# Altium PCB C.PcbDoc
Units mm, origin at the board's own origin, x right, y up, seen from the top; angles counter-clockwise.
Board outline 22 x 42 mm, 2 copper layers (Top Layer, Bottom Layer); 2 components, 6 nets, 34 pads, 0 vias.
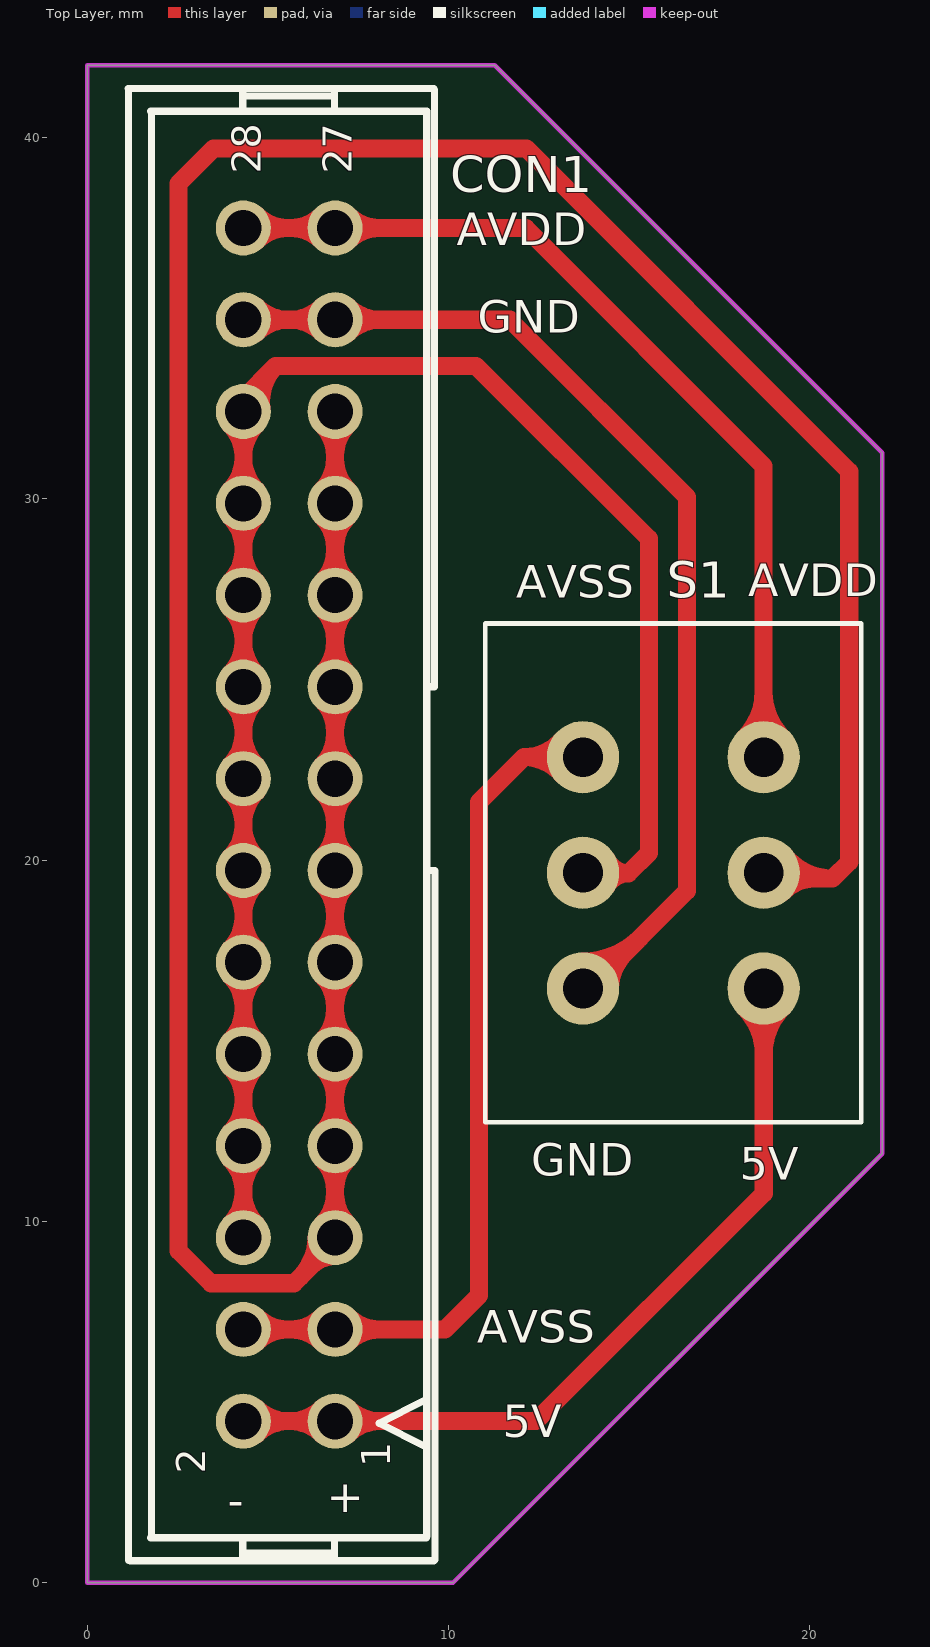
[diagram p0: Top Layer view]
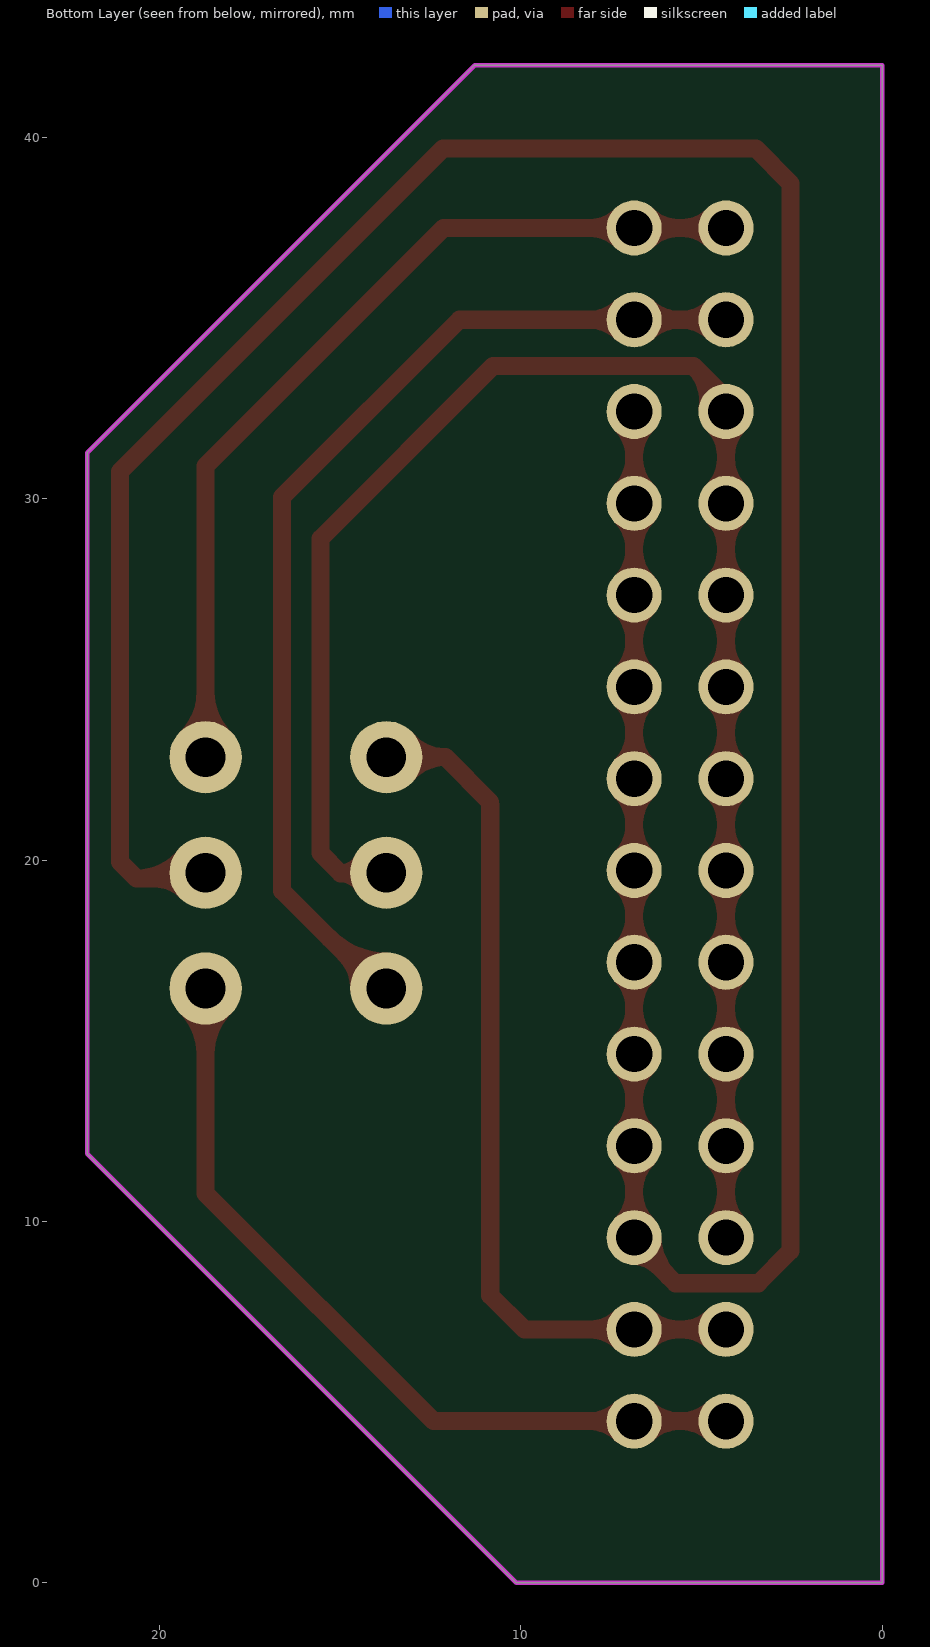
[diagram p1: Bottom Layer view, seen from below]

## Layer stack, top to bottom
Top Layer: signal copper 0.0356
Dielectric: dielectric 0.32, FR-4, Dk 4.8
Bottom Layer: signal copper 0.0356

## Board outline
0,0 0,42 11.278,42 22,31.278 22,11.875 10.125,0

## Design rules (kind name [scope] priority, off if disabled: settings)
Clearance Clearance_1 [inpolygon] p1: gap=0.5
Clearance [All] p2: gap=0.15
MinimumSolderMaskSliver [All] p1: minsoldermaskwidth=0.01
PolygonConnect PolygonConnect_1 [isvia] p1: connectstyle=Direct reliefconductorwidth=0.254 reliefentries=4 polygonreliefangle="90 Angle"
PolygonConnect [All] p2: connectstyle=Relief reliefconductorwidth=0.254 reliefentries=4 polygonreliefangle="90 Angle"
RoutingVias [All] p1: holewidth=0.3 width=0.66 viastyle="Through Hole" minholewidth=0.3 minwidth=0.66 maxholewidth=0.3 maxwidth=0.66
SilkToSilkClearance [All] p1: silktosilkclearance=0.01
SilkscreenOverComponentPads [All] p1: minsilkscreentomaskgap=0.01
SolderMaskExpansion [All] p1: expansion=0.102
Width [All] p1: maxlimit=1 minlimit=0.15 preferedwidth=0.254 minimp=50.000000 maximp=50.000000 favimp=50.000000
25 further rules are at their usual default settings.

## Components (designator, comment, footprint, x,y, rotation, side; value= is the part's Value field where it differs from the comment)
CON1 "SV1" 26 5.591,22.254 r0 top locked
S1 "switch" switch1 16.221,19.65 r270 top locked

## Footprints (in the part's own frame and the unit in brackets; to place one, negate y for a bottom-side part, rotate by r counter-clockwise, add the part's x,y. Pads: shape width x height; smd on the part's side, far side on the other; paste and mask are expansions set on the pad)
26 [mil]
  round 60 hole 39.37: 1(50,-700) 2(-50,-700) 3(50,-600) 4(-50,-600) 5(50,-500) 6(-50,-500) 7(50,-400) 8(-50,-400) 9(50,-300) 10(-50,-300) 11(50,-200) 12(-50,-200) 13(50,-100) 14(-50,-100) 15(50,0) 16(-50,0) 17(50,100) 18(-50,100) 19(50,200) 20(-50,200) 21(50,300) 22(-50,300) 23(50,400) 24(-50,400) 25(50,500) 26(-50,500) 27(50,600) 28(-50,600)
  silkscreen extent -176,-852 159,752
switch1 [mm]
  round 2 hole 1.1: 1(-3.2,2.5) 2(0,2.5) 3(3.2,2.5) 4(-3.2,-2.5) 5(0,-2.5) 6(3.2,-2.5)
  silkscreen extent -6.9,-5.2 6.9,5.2

## Part data
CON1: library part 26
S1: library part "switch 1"

## Nets (pads, with @x,y where several pads share a name; then routed paths per layer and width w, separated by ;. In a path a pad name is that pad's centre, name@x,y a point inside that pad or via, vN(x,y) a via of type N, cw(c..) or ccw(c..) an arc to the next point about the centre after c; other vN are vias at no path point)
5V: CON1.1 CON1.2 S1.3 | length 31.3
  Top Layer w0.5: CON1.2 CON1.1 12.419,4.474 18.723,10.778 S1.3@18.723,16.406 ; CON1.2@4.683,4.112 cw(c5.558,3.238) 5.558,4.474 cw(c5.558,5.71) CON1.2@4.683,4.836 ; CON1.1@6.499,4.112 ccw(c5.625,3.238) 5.625,4.474 ccw(c5.625,5.71) CON1.1@6.499,4.836 ; CON1.1@7.223,4.112 cw(c8.098,3.238) 8.098,4.474 cw(c8.098,5.71) CON1.1@7.223,4.836 ; S1.3@18.191,15.919 cw(c16.904,14.633) 18.723,14.633 ; 18.723,14.645 cw(c20.526,14.645) S1.3@19.251,15.919
AVDD: CON1.27 CON1.28 S1.1 | length 33.9
  Top Layer w0.5: CON1.28 CON1.27 12.138,37.494 18.721,30.911 S1.1 ; CON1.28@4.683,37.132 cw(c5.558,36.258) 5.558,37.494 cw(c5.558,38.73) CON1.28@4.683,37.856 ; CON1.27@6.499,37.132 ccw(c5.625,36.258) 5.625,37.494 ccw(c5.625,38.73) CON1.27@6.499,37.856 ; CON1.27@7.223,37.132 cw(c8.098,36.258) 8.098,37.494 cw(c8.098,38.73) CON1.27@7.223,37.856 ; S1.1@18.191,23.38 ccw(c16.91,24.66) 18.721,24.66 ccw(c20.532,24.66) S1.1@19.251,23.38
AVDD/5V: CON1.5 CON1.7 CON1.9 CON1.11 CON1.13 CON1.15 CON1.17 CON1.19 CON1.21 CON1.23 S1.2 | length 133.3
  Top Layer w0.5: 5.9,8.468 ccw(c4.814,9.554) CON1.5@6.349,9.554 ; 6.199,8.767 cw(c6.861,8.105) CON1.5@6.861,9.042 ; CON1.5@6.499,9.916 ccw(c5.625,10.79) 6.861,10.79 ccw(c8.098,10.79) CON1.5@7.223,9.916 ; CON1.7@6.499,11.732 cw(c5.625,10.858) 6.861,10.858 cw(c8.098,10.858) CON1.7@7.223,11.732 ; CON1.7@6.499,12.456 ccw(c5.625,13.33) 6.861,13.33 ccw(c8.098,13.33) CON1.7@7.223,12.456 ; CON1.9@6.499,14.272 cw(c5.625,13.398) 6.861,13.398 cw(c8.098,13.398) CON1.9@7.223,14.272 ; CON1.9@6.499,14.996 ccw(c5.625,15.87) 6.861,15.87 ccw(c8.098,15.87) CON1.9@7.223,14.996 ; CON1.11@6.499,16.812 cw(c5.625,15.938) 6.861,15.938 cw(c8.098,15.938) CON1.11@7.223,16.812 ; CON1.11@6.499,17.536 ccw(c5.625,18.41) 6.861,18.41 ccw(c8.098,18.41) CON1.11@7.223,17.536 ; CON1.13@6.499,19.352 cw(c5.625,18.478) 6.861,18.478 cw(c8.098,18.478) CON1.13@7.223,19.352 ; CON1.13@6.499,20.076 ccw(c5.625,20.95) 6.861,20.95 ccw(c8.098,20.95) CON1.13@7.223,20.076 ; CON1.15@6.499,21.892 cw(c5.625,21.018) 6.861,21.018 cw(c8.098,21.018) CON1.15@7.223,21.892 ; CON1.15@6.499,22.616 ccw(c5.625,23.49) 6.861,23.49 ccw(c8.098,23.49) CON1.15@7.223,22.616 ; CON1.17@6.499,24.432 cw(c5.625,23.558) 6.861,23.558 cw(c8.098,23.558) CON1.17@7.223,24.432 ; CON1.17@6.499,25.156 ccw(c5.625,26.03) 6.861,26.03 ccw(c8.098,26.03) CON1.17@7.223,25.156 ; CON1.19@6.499,26.972 cw(c5.625,26.098) 6.861,26.098 cw(c8.098,26.098) CON1.19@7.223,26.972 ; CON1.19@6.499,27.696 ccw(c5.625,28.57) 6.861,28.57 ccw(c8.098,28.57) CON1.19@7.223,27.696 ; CON1.21@6.499,29.512 cw(c5.625,28.638) 6.861,28.638 cw(c8.098,28.638) CON1.21@7.223,29.512 ; CON1.21@6.499,30.236 ccw(c5.625,31.11) 6.861,31.11 ccw(c8.098,31.11) CON1.21@7.223,30.236 ; CON1.23@6.499,32.052 cw(c5.625,31.178) 6.861,31.178 cw(c8.098,31.178) CON1.23@7.223,32.052 ; CON1.5 CON1.7 CON1.9 CON1.11 CON1.13 CON1.15 CON1.17 CON1.19 CON1.21 CON1.23 ; CON1.5@6.903,9.471 5.723,8.291 3.429,8.291 2.53,9.19 2.53,38.725 3.495,39.69 12.156,39.69 21.091,30.755 21.091,19.95 20.631,19.49 ; S1.2@18.503,19.49 20.631,19.49 ; S1.2@19.251,19.119 cw(c20.147,18.223) 20.147,19.49 ; S1.2@19.303,20.122 ccw(c20.631,21.201) 20.631,19.49
AVSS: CON1.3 CON1.4 S1.4 | length 32.1
  Top Layer w0.5: CON1.4 CON1.3 9.902,7.014 10.845,7.957 10.845,21.526 ; CON1.4@4.683,6.652 cw(c5.558,5.778) 5.558,7.014 cw(c5.558,8.25) CON1.4@4.683,7.376 ; CON1.3@6.499,6.652 ccw(c5.625,5.778) 5.625,7.014 ccw(c5.625,8.25) CON1.3@6.499,7.376 ; CON1.3@7.223,6.652 cw(c8.098,5.778) 8.098,7.014 cw(c8.098,8.25) CON1.3@7.223,7.376 ; 10.847,21.609 12.088,22.85 S1.4 ; S1.4@13.152,22.361 ccw(c12.088,21.446) 12.088,22.85 ccw(c12.088,24.253) S1.4@13.152,23.338
AVSS/GND: CON1.6 CON1.8 CON1.10 CON1.12 CON1.14 CON1.16 CON1.18 CON1.20 CON1.22 CON1.24 S1.5 | length 85.3
  Top Layer w0.5: CON1.6@3.959,9.916 ccw(c3.085,10.79) 4.321,10.79 ccw(c5.558,10.79) CON1.6@4.683,9.916 ; CON1.8@3.959,11.732 cw(c3.085,10.858) 4.321,10.858 cw(c5.558,10.858) CON1.8@4.683,11.732 ; CON1.8@3.959,12.456 ccw(c3.085,13.33) 4.321,13.33 ccw(c5.558,13.33) CON1.8@4.683,12.456 ; CON1.10@3.959,14.272 cw(c3.085,13.398) 4.321,13.398 cw(c5.558,13.398) CON1.10@4.683,14.272 ; CON1.10@3.959,14.996 ccw(c3.085,15.87) 4.321,15.87 ccw(c5.558,15.87) CON1.10@4.683,14.996 ; CON1.12@3.959,16.812 cw(c3.085,15.938) 4.321,15.938 cw(c5.558,15.938) CON1.12@4.683,16.812 ; CON1.12@3.959,17.536 ccw(c3.085,18.41) 4.321,18.41 ccw(c5.558,18.41) CON1.12@4.683,17.536 ; CON1.14@3.959,19.352 cw(c3.085,18.478) 4.321,18.478 cw(c5.558,18.478) CON1.14@4.683,19.352 ; CON1.14@3.959,20.076 ccw(c3.085,20.95) 4.321,20.95 ccw(c5.558,20.95) CON1.14@4.683,20.076 ; CON1.16@3.959,21.892 cw(c3.085,21.018) 4.321,21.018 cw(c5.558,21.018) CON1.16@4.683,21.892 ; CON1.16@3.959,22.616 ccw(c3.085,23.49) 4.321,23.49 ccw(c5.558,23.49) CON1.16@4.683,22.616 ; CON1.18@3.959,24.432 cw(c3.085,23.558) 4.321,23.558 cw(c5.558,23.558) CON1.18@4.683,24.432 ; CON1.18@3.959,25.156 ccw(c3.085,26.03) 4.321,26.03 ccw(c5.558,26.03) CON1.18@4.683,25.156 ; CON1.20@3.959,26.972 cw(c3.085,26.098) 4.321,26.098 cw(c5.558,26.098) CON1.20@4.683,26.972 ; CON1.20@3.959,27.696 ccw(c3.085,28.57) 4.321,28.57 ccw(c5.558,28.57) CON1.20@4.683,27.696 ; CON1.22@3.959,29.512 cw(c3.085,28.638) 4.321,28.638 cw(c5.558,28.638) CON1.22@4.683,29.512 ; CON1.22@3.959,30.236 ccw(c3.085,31.11) 4.321,31.11 ccw(c5.558,31.11) CON1.22@4.683,30.236 ; CON1.24@3.959,32.052 cw(c3.085,31.178) 4.321,31.178 cw(c5.558,31.178) CON1.24@4.683,32.052 ; CON1.6@4.321,9.527 CON1.10 CON1.12 CON1.14 CON1.16 CON1.18 CON1.20 CON1.22 4.321,32.778 5.218,33.675 ; CON1.24@4.828,32.49 cw(c6.197,32.696) 5.218,33.675 ; S1.5@13.726,19.636 14.984,19.636 ; S1.5@14.374,19.28 cw(c14.984,18.935) 14.984,19.636 ; S1.5@14.385,19.998 ccw(c14.984,20.312) 14.984,19.636 ; 5.218,33.675 10.764,33.675 15.546,28.893 15.546,20.199 14.984,19.636
GND: CON1.25 CON1.26 S1.6 | length 37.9
  Top Layer w0.5: CON1.26 CON1.25 11.696,34.954 16.605,30.044 16.605,19.152 13.903,16.45 S1.6 ; CON1.26@4.683,34.592 cw(c5.558,33.718) 5.558,34.954 cw(c5.558,36.19) CON1.26@4.683,35.316 ; CON1.25@6.499,34.592 ccw(c5.625,33.718) 5.625,34.954 ccw(c5.625,36.19) CON1.25@6.499,35.316 ; CON1.25@7.223,34.592 cw(c8.098,33.718) 8.098,34.954 cw(c8.098,36.19) CON1.25@7.223,35.316 ; S1.6@13.721,17.2 ccw(c13.721,19.449) 15.311,17.858 ; S1.6@14.471,16.45 cw(c15.843,16.45) 14.873,17.42

## Keep-outs
Keep-Out Layer:
  the board outline again, w0.127

## Silkscreen, mask and mechanical layers (free items; w line width, h text height)
Top Overlay:
  text "AVDD" at 10.224,37.01 h0.9
  text "GND" at 10.812,34.597 h0.9
  text "AVDD" at 18.29,27.309 h0.9
  text "AVSS" at 11.875,27.257 h0.9
  text "GND" at 12.293,11.267 h0.9
  text "5V" at 18.061,11.152 h0.9
  text "AVSS" at 10.79,6.65 h0.9
  text "5V" at 11.504,4.028 h0.9
  text "+" at 6.628,1.959 h0.9
  text "-" at 3.888,1.844 h0.9

## Text inside footprints (layer, text, board x,y; h text height)
CON1: Top Overlay "1" at 8.389,3.201 h0.8 r90; Top Overlay "2" at 3.271,3.02 h0.8 r90; Top Overlay "28" at 4.804,38.992 h0.8 r90; Top Overlay "27" at 7.319,38.992 h0.8 r90